# Altium PCB AX301_AX4010.PcbDoc (part 8 of 10)
Units mil, origin at the board's own origin, x right, y up, seen from the top; angles counter-clockwise.
Board outline 5185 x 3614 mil, 4 copper layers (Top Layer, GND, Mid-Layer 1, Bottom Layer); 191 components, 338 nets, 1108 pads, 420 vias.
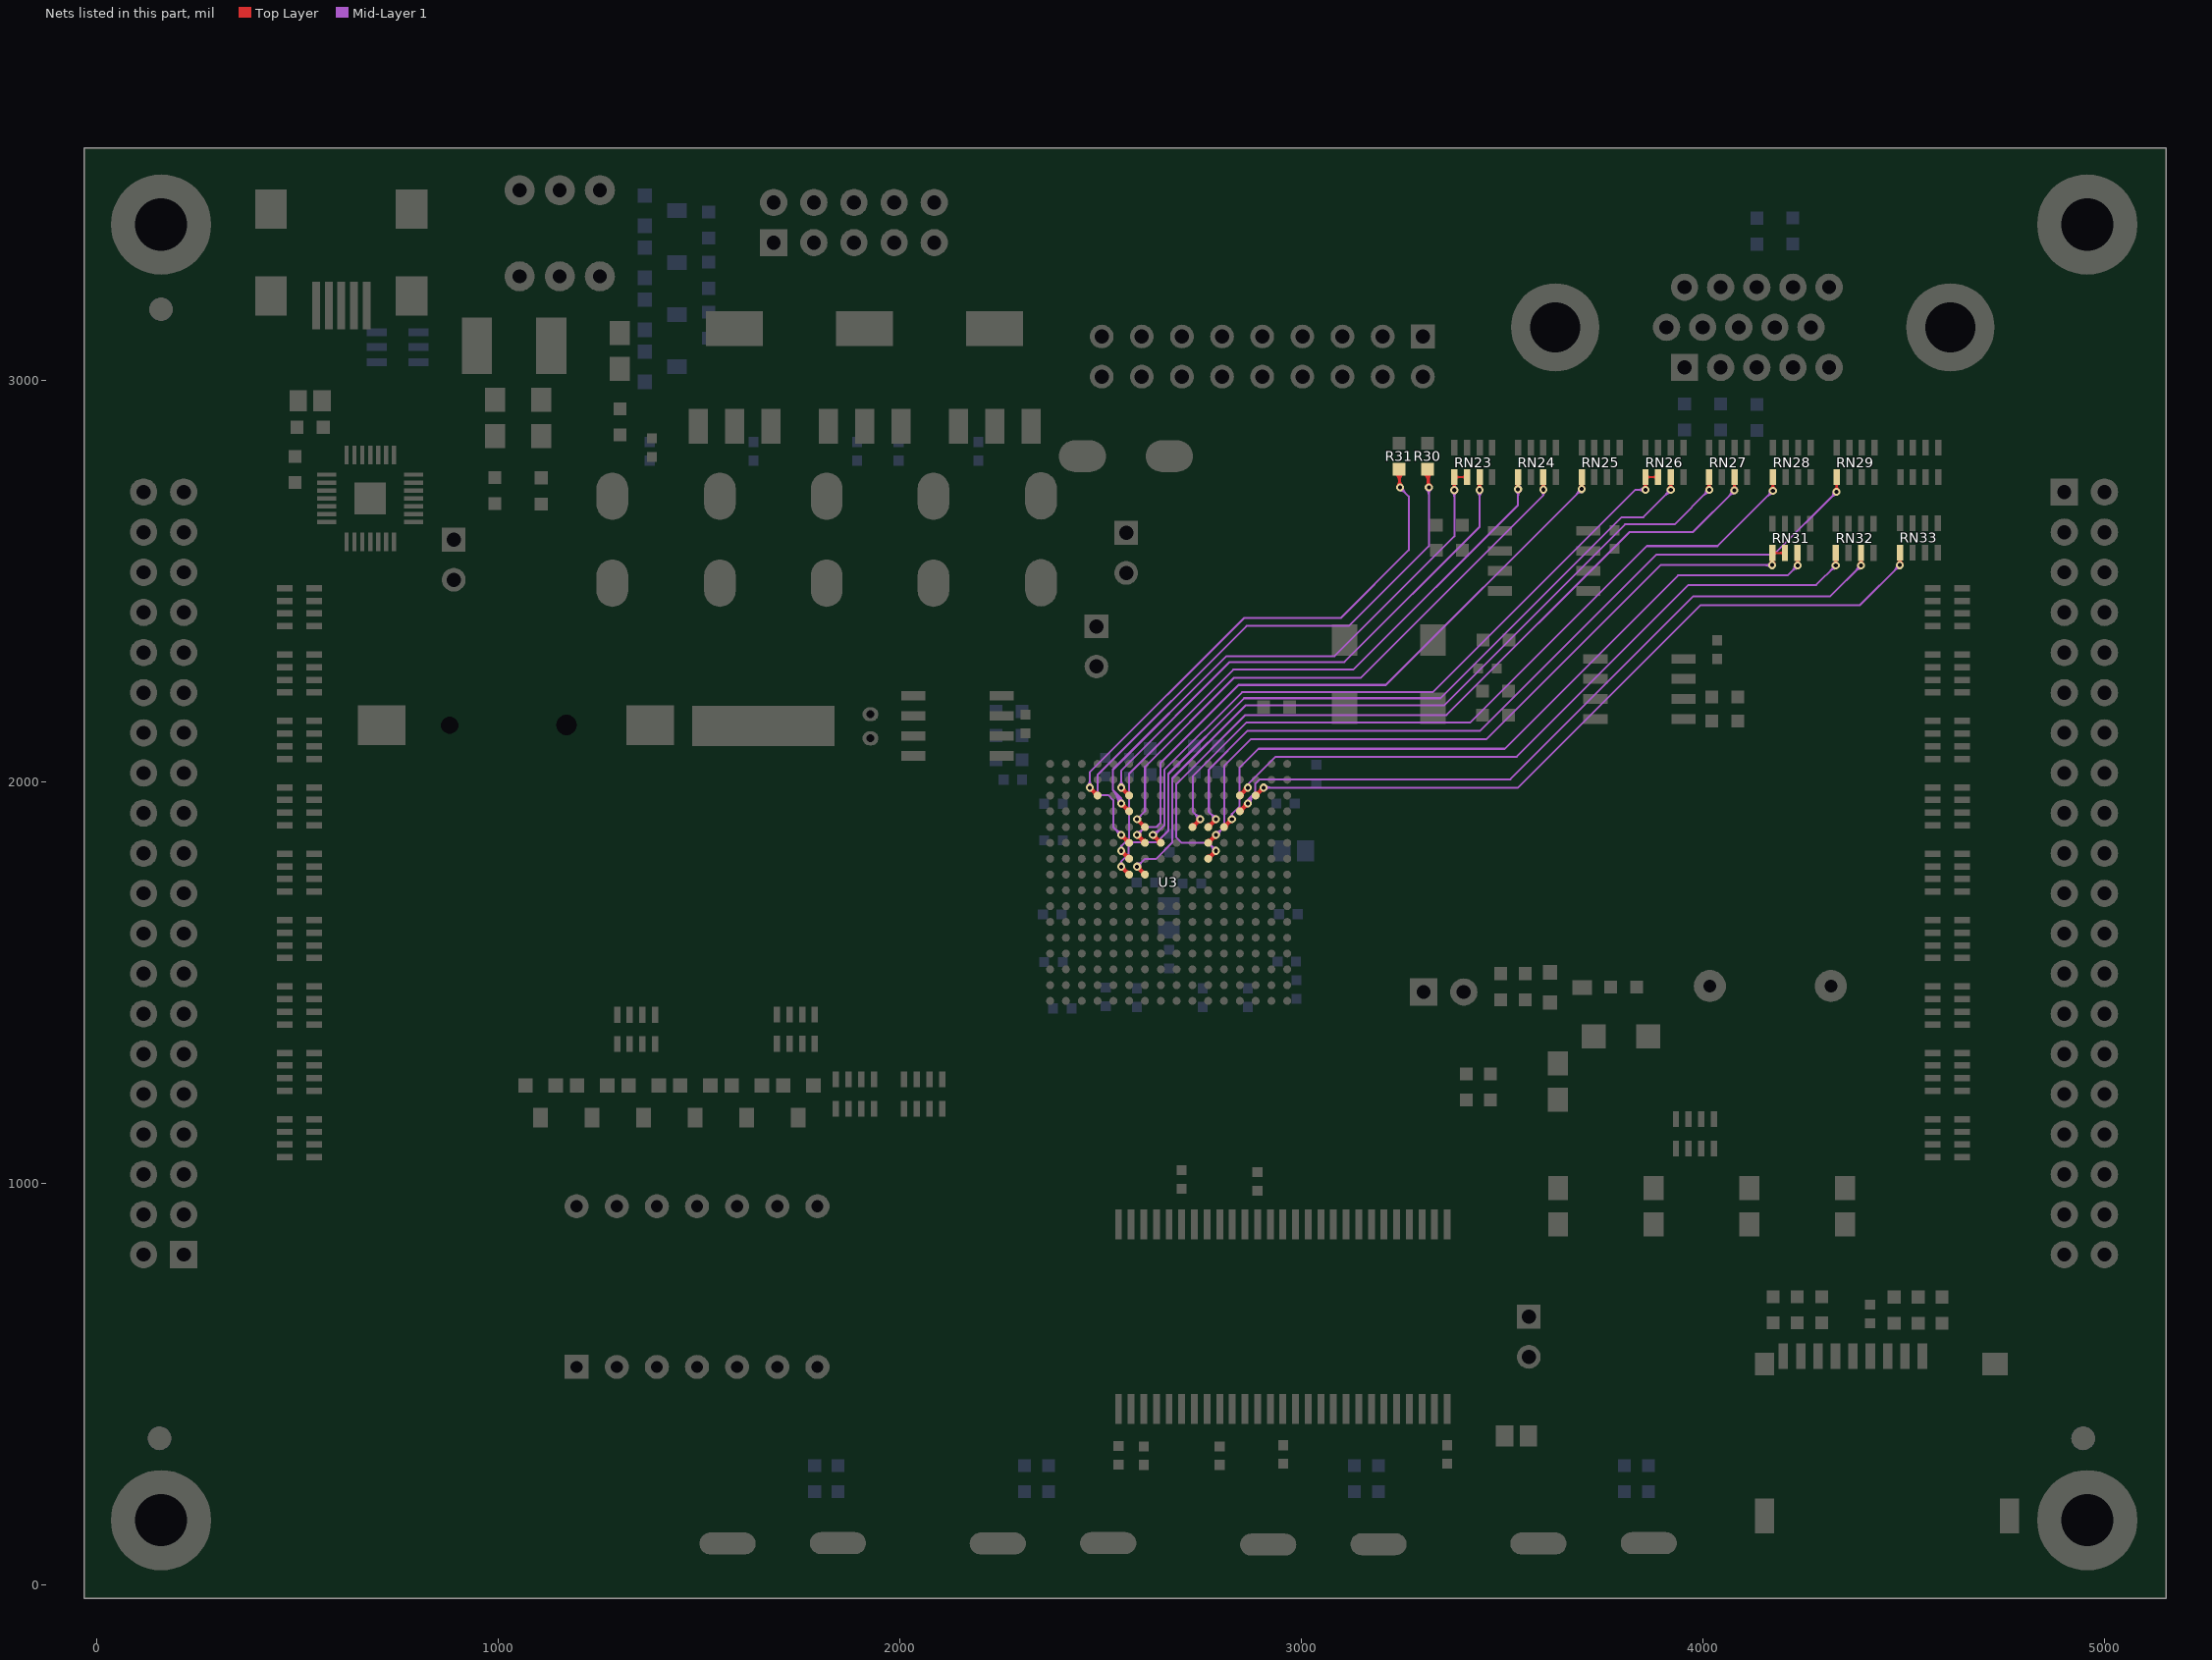
[diagram p10: the nets of this part, all layers, seen from the top]

## Via types
v1: diameter 20, hole 10, Top Layer to Bottom Layer, 377 vias
v2: diameter 30, hole 15, Top Layer to Bottom Layer, 41 vias
v3: diameter 40, hole 20, Top Layer to Bottom Layer, 2 vias

## Nets (pads, with @x,y where several pads share a name; then routed paths per layer and width w, separated by ;. In a path a pad name is that pad's centre, name@x,y a point inside that pad or via, vN(x,y) a via of type N, cw(c..) or ccw(c..) an arc to the next point about the centre after c; other vN are vias at no path point) (continued)
VGA_HSYNC: R30.2 U3.L6 | length 1688.8
  Top Layer w5: R30.2@3305.45,2768.45 cw(c3275.17,2738.17) v1@3318,2738.17 ; R30.2@3308.99,2771.99 cw(c3287.24,2750.24) 3318,2750.24 ; v1@3311.61,2736.93 ccw(c3292.71,2748.56) 3314.3,2753.7 ; v1@3312.7,2738.3 ccw(c3299.89,2751.11) 3318,2751.11 ccw(c3336.11,2751.11) v1@3323.3,2738.3 ; 3315.64,2748.08 ccw(c3329.28,2751.33) v1@3321.93,2739.39 ; v1(3318,2733) R30.2@3318,2775 ; 3318,2752.65 cw(c3340.35,2752.65) R30.2@3324.55,2768.45
  Top Layer w10: v1@2551.89,1862.11 cw(c2551.89,1850.04) 2560.42,1858.58 cw(c2568.96,1867.11) v1@2556.89,1867.11 ; v1(2551.89,1867.11) U3.L6@2571.57,1847.43 ; U3.L6@2566.73,1847.43 ccw(c2555.04,1847.43) 2563.31,1855.69 ccw(c2571.57,1863.96) U3.L6@2571.57,1852.27
  Mid-Layer 1 w5: v1@2544.39,1867.11 ccw(c2526.28,1867.11) 2539.09,1879.91 ccw(c2551.89,1892.72) v1@2551.89,1874.61 ; v1(2551.89,1867.11) 2532,1887 2532,1954 2519,1967 2500,1967 2493,1974 2493,2017 2864,2388 3119,2388 3318,2587 v1(3318,2733) ; v1@3312.7,2727.7 cw(c3299.89,2714.89) 3318,2714.89 cw(c3336.11,2714.89) v1@3323.3,2727.7
VGA_VSYNC: R31.2 U3.N3 | length 1521
  Top Layer w5: R31.2@3234.45,2768.45 cw(c3206.58,2740.58) v1@3246,2740.58 ; R31.2@3237.99,2771.99 cw(c3218.65,2752.65) 3246,2752.65 ; v1@3239.77,2737.18 ccw(c3221.64,2749.33) 3242.93,2754.15 ; v1@3240.7,2738.3 ccw(c3227.89,2751.11) 3246,2751.11 ccw(c3264.11,2751.11) v1@3251.3,2738.3 ; 3244.53,2747.09 ccw(c3256.61,2749.82) v1@3250,2739.34 ; v1(3246,2733) R31.2@3246,2776 ; 3246,2750.24 cw(c3271.76,2750.24) R31.2@3253.55,2768.45
  Top Layer w10: v1@2473.15,1980.22 cw(c2473.15,1968.15) 2481.68,1976.69 cw(c2490.22,1985.22) v1@2478.15,1985.22 ; v1(2473.15,1985.22) U3.N3@2492.83,1965.54 ; U3.N3@2487.99,1965.54 ccw(c2476.3,1965.54) 2484.57,1973.8 ccw(c2492.83,1982.07) U3.N3@2492.83,1970.38
  Mid-Layer 1 w5: v1@2467.85,1990.52 ccw(c2455.04,2003.33) 2473.15,2003.33 ccw(c2491.26,2003.33) v1@2478.45,1990.52 ; v1(2473.15,1985.22) 2473.15,2023.15 2858,2408 3099,2408 3268,2577 3268,2711 v1(3246,2733) ; v1@3246,2725.5 cw(c3246,2707.39) 3258.8,2720.2 cw(c3271.61,2733) v1@3253.5,2733
VGAD0: RN33.5 U3.C3 | length 2033.8
  Top Layer w5: v1@4486.21,2544.79 ccw(c4473.41,2557.59) 4491.51,2557.59 ccw(c4509.62,2557.59) v1@4496.82,2544.79 ; RN33.5@4487.71,2555.24 cw(c4478.54,2546.07) 4491.51,2546.07 cw(c4504.49,2546.07) RN33.5@4495.31,2555.24 ; v1@4488.89,2546.52 ccw(c4487.96,2549.01) 4490.54,2549.7 ccw(c4494.62,2550.8) v1@4493.5,2546.72 ; v1@4489.52,2546.72 ccw(c4488.4,2550.8) 4492.49,2549.7 ccw(c4495.06,2549.01) v1@4494.13,2546.52 ; v1(4491.51,2539.49) RN33.5@4491.51,2570.85
  Top Layer w10: U3.C3@2886.54,1965.54 v1(2906.22,1985.22) ; U3.C3@2886.54,1970.38 ccw(c2886.54,1982.07) 2894.8,1973.8 ccw(c2903.07,1965.54) U3.C3@2891.38,1965.54 ; v1@2901.22,1985.22 cw(c2889.15,1985.22) 2897.69,1976.69 cw(c2906.22,1968.15) v1@2906.22,1980.22
  Mid-Layer 1 w5: v1(2906.22,1985.22) 3540.22,1985.22 3995,2440 4392.02,2440 v1(4491.51,2539.49) ; v1@2911.52,1979.92 cw(c2924.33,1967.11) 2924.33,1985.22 cw(c2924.33,2003.33) v1@2911.52,1990.52 ; v1@4484.01,2539.49 cw(c4465.91,2539.49) 4478.71,2526.68 cw(c4491.51,2513.88) v1@4491.51,2531.99
VGAD1: RN32.7 U3.D4 | length 2046.5
  Top Layer w5: v1@4389.2,2543.8 ccw(c4376.4,2556.6) 4394.5,2556.6 ccw(c4412.61,2556.6) v1@4399.81,2543.8 ; RN32.7@4390.7,2554.24 cw(c4381.53,2545.07) 4394.5,2545.07 cw(c4407.48,2545.07) RN32.7@4398.3,2554.24 ; v1@4391.89,2545.52 ccw(c4390.96,2548.02) 4393.53,2548.71 ccw(c4397.61,2549.8) v1@4396.49,2545.73 ; v1@4392.52,2545.73 ccw(c4391.4,2549.8) 4395.48,2548.71 ccw(c4398.05,2548.02) v1@4397.12,2545.52 ; v1(4394.5,2538.5) RN32.7@4394.5,2569.85
  Top Layer w10: U3.D4@2847.17,1926.17 v1(2866.85,1945.85) ; U3.D4@2847.17,1931.01 ccw(c2847.17,1942.7) 2855.43,1934.43 ccw(c2863.7,1926.17) U3.D4@2852.01,1926.17 ; v1@2861.85,1945.85 cw(c2849.78,1945.85) 2858.32,1937.32 cw(c2866.85,1928.78) v1@2866.85,1940.85
  Mid-Layer 1 w5: v1@2864.35,1945.85 cw(c2880.02,1945.86) 2868.94,1956.94 ; v1(2866.85,1945.85) 2866.85,1954.85 2886,1974 ; v1@2869.35,1945.85 cw(c2897.07,1945.87) 2877.47,1965.47 ; v1@2874.35,1945.86 cw(c2914.12,1945.88) 2886,1974 ; v1@4387,2538.5 cw(c4368.9,2538.5) 4381.7,2525.69 cw(c4394.5,2512.89) v1@4394.5,2531 ; v1(4394.5,2538.5) 4318.01,2462 3977,2462 3521,2006 2897,2006 2886,1995 2886,1974
VGAD2: RN32.5 U3.D3 | length 1888.8
  Top Layer w5: v1@4326.21,2543.79 ccw(c4313.41,2556.59) 4331.51,2556.59 ccw(c4349.62,2556.59) v1@4336.82,2543.79 ; RN32.5@4327.71,2554.24 cw(c4318.54,2545.07) 4331.51,2545.07 cw(c4344.49,2545.07) RN32.5@4335.31,2554.24 ; v1@4328.89,2545.52 ccw(c4327.96,2548.01) 4330.54,2548.7 ccw(c4334.62,2549.8) v1@4333.5,2545.72 ; v1@4329.52,2545.72 ccw(c4328.4,2549.8) 4332.49,2548.7 ccw(c4335.06,2548.01) v1@4334.13,2545.52 ; v1(4331.51,2538.49) RN32.5@4331.51,2569.85
  Top Layer w10: U3.D3@2847.17,1965.54 v1(2866.85,1985.22) ; U3.D3@2847.17,1970.38 ccw(c2847.17,1982.07) 2855.43,1973.8 ccw(c2863.7,1965.54) U3.D3@2852.01,1965.54 ; v1@2861.85,1985.22 cw(c2849.78,1985.22) 2858.32,1976.69 cw(c2866.85,1968.15) v1@2866.85,1980.22
  Mid-Layer 1 w5: v1(2866.85,1985.22) 2866.85,1992.85 2936,2062 3537,2062 3965,2490 4283.02,2490 v1(4331.51,2538.49) ; v1@4324.01,2538.49 cw(c4305.91,2538.49) 4318.71,2525.68 cw(c4331.51,2512.88) v1@4331.51,2530.99
VGAD3: RN31.7 U3.E5 | length 1940.8
  Top Layer w5: v1@4231.2,2543.8 ccw(c4218.4,2556.6) 4236.5,2556.6 ccw(c4254.61,2556.6) v1@4241.81,2543.8 ; RN31.7@4232.7,2554.24 cw(c4223.53,2545.07) 4236.5,2545.07 cw(c4249.48,2545.07) RN31.7@4240.3,2554.24 ; v1@4233.89,2545.52 ccw(c4232.96,2548.02) 4235.53,2548.71 ccw(c4239.61,2549.8) v1@4238.49,2545.73 ; v1@4234.52,2545.73 ccw(c4233.4,2549.8) 4237.48,2548.71 ccw(c4240.05,2548.02) v1@4239.12,2545.52 ; v1(4236.5,2538.5) RN31.7@4236.5,2569.85
  Top Layer w10: U3.E5@2807.8,1886.8 v1(2827.48,1906.48) ; U3.E5@2807.8,1891.64 ccw(c2807.8,1903.33) 2816.06,1895.06 ccw(c2824.33,1886.8) U3.E5@2812.64,1886.8 ; v1@2822.48,1906.48 cw(c2810.41,1906.48) 2818.95,1897.95 cw(c2827.48,1889.41) v1@2827.48,1901.48
  Mid-Layer 1 w5: v1@2823.73,1912.97 ccw(c2819.97,1919.48) 2827.48,1919.48 ; v1(2827.48,1906.48) 2827.48,1919.48 ; v1@2831.24,1912.97 cw(c2835,1919.48) 2827.48,1919.48 ; v1@4229,2538.5 cw(c4210.9,2538.5) 4223.7,2525.69 cw(c4236.5,2512.89) v1@4236.5,2531 ; v1(4236.5,2538.5) 4212.01,2514 3939,2514 3507,2082 2894,2082 2846,2034 2846,1938 2827.48,1919.48
VGAD4: RN31.5 RN31.6 U3.F6 | length 2026.4
  Top Layer w5: v1@4168.21,2544.79 ccw(c4155.41,2557.59) 4173.51,2557.59 ccw(c4191.62,2557.59) v1@4178.82,2544.79 ; RN31.5@4169.71,2554.24 cw(c4160.54,2545.07) 4173.51,2545.07 cw(c4186.49,2545.07) RN31.5@4177.31,2554.24 ; v1(4173.51,2539.49) RN31.5@4173.51,2569.85 RN31.6@4205.01,2569.85 ; RN31.5@4177.31,2566.05 cw(c4186.49,2556.88) 4186.49,2569.85 cw(c4186.49,2582.82) RN31.5@4177.31,2573.65 ; RN31.6@4201.21,2566.05 ccw(c4192.03,2556.88) 4192.03,2569.85 ccw(c4192.03,2582.82) RN31.6@4201.21,2573.65
  Top Layer w10: U3.F6@2768.43,1847.43 v1(2788.11,1867.11) ; U3.F6@2768.43,1852.27 ccw(c2768.43,1863.96) 2776.69,1855.69 ccw(c2784.96,1847.43) U3.F6@2773.27,1847.43 ; v1@2783.11,1867.11 cw(c2771.04,1867.11) 2779.58,1858.58 cw(c2788.11,1850.04) v1@2788.11,1862.11
  Mid-Layer 1 w5: v1(2788.11,1867.11) 2808,1887 2808,2039 2875,2106 3462,2106 3895.49,2539.49 v1(4173.51,2539.49) ; v1@2788.11,1874.61 ccw(c2788.11,1892.72) 2800.91,1879.91 ccw(c2813.72,1867.11) v1@2795.61,1867.11 ; v1@4168.21,2534.18 ccw(c4155.41,2521.38) 4155.41,2539.49 ccw(c4155.41,2557.59) v1@4168.21,2544.79
VGAD5: RN29.5 U3.F5 | length 2189.1
  Top Layer w5: v1@4328.49,2727.51 ccw(c4315.69,2740.31) 4333.8,2740.31 ccw(c4351.9,2740.31) v1@4339.1,2727.51 ; RN29.5@4330,2743.24 cw(c4320.82,2734.07) 4333.8,2734.07 cw(c4346.77,2734.07) RN29.5@4337.6,2743.24 ; v1(4333.8,2722.2) RN29.5@4333.8,2758.85
  Top Layer w10: U3.F5@2768.43,1886.8 v1(2788.11,1906.48) ; U3.F5@2768.43,1891.64 ccw(c2768.43,1903.33) 2776.69,1895.06 ccw(c2784.96,1886.8) U3.F5@2773.27,1886.8 ; v1@2783.11,1906.48 cw(c2771.04,1906.48) 2779.58,1897.95 cw(c2788.11,1889.41) v1@2788.11,1901.48
  Mid-Layer 1 w5: v1@2780.61,1906.48 ccw(c2762.5,1906.48) 2775.31,1919.28 ccw(c2788.11,1932.09) v1@2788.11,1913.98 ; v1(2788.11,1906.48) 2770,1924.59 2770,2030 2867,2127 3446,2127 3885,2566 4177.59,2566 v1(4333.8,2722.2) ; v1@4326.3,2722.2 cw(c4308.19,2722.2) 4320.99,2709.4 cw(c4333.8,2696.6) v1@4333.8,2714.7
VGAD6: RN28.5 U3.G5 | length 2084.5
  Top Layer w5: v1@4169.78,2730.22 ccw(c4156.98,2743.02) 4175.08,2743.02 ccw(c4193.19,2743.02) v1@4180.39,2730.22 ; RN28.5@4171.28,2743.24 cw(c4162.11,2734.07) 4175.08,2734.07 cw(c4188.06,2734.07) RN28.5@4178.88,2743.24 ; v1@4171.71,2731.62 ccw(c4168.19,2738.62) 4175.76,2736.59 ccw(c4179.7,2735.54) v1@4178.07,2731.8 ; v1@4172.09,2731.8 ccw(c4170.47,2735.54) 4174.41,2736.59 ccw(c4181.98,2738.62) v1@4178.45,2731.62 ; v1(4175.08,2724.92) RN28.5@4175.08,2758.85
  Top Layer w10: U3.G5@2729.06,1886.8 v1(2748.74,1906.48) ; U3.G5@2729.06,1891.64 ccw(c2729.06,1903.33) 2737.32,1895.06 ccw(c2745.59,1886.8) U3.G5@2733.9,1886.8 ; v1@2743.74,1906.48 cw(c2731.67,1906.48) 2740.21,1897.95 cw(c2748.74,1889.41) v1@2748.74,1901.48
  Mid-Layer 1 w5: v1@2741.24,1906.48 ccw(c2723.13,1906.48) 2735.94,1919.28 ccw(c2748.74,1932.09) v1@2748.74,1913.98 ; v1(2748.74,1906.48) 2730,1925.22 2730,2014 2863,2147 3421,2147 3861,2587 4037.17,2587 v1(4175.08,2724.92) ; v1@4167.58,2724.92 cw(c4149.48,2724.92) 4162.28,2712.11 cw(c4175.08,2699.31) v1@4175.08,2717.42
VGAD7: RN27.7 U3.F7 | length 2165.9
  Top Layer w5: v1@4074.06,2730.94 ccw(c4061.25,2743.75) 4079.36,2743.75 ccw(c4097.47,2743.75) v1@4084.66,2730.94 ; RN27.7@4075.56,2743.24 cw(c4066.39,2734.07) 4079.36,2734.07 cw(c4092.33,2734.07) RN27.7@4083.16,2743.24 ; v1@4076.35,2732.51 ccw(c4073.66,2738.64) 4080.12,2736.9 ccw(c4083.67,2735.95) v1@4082.25,2732.56 ; v1@4076.47,2732.56 ccw(c4075.05,2735.95) 4078.6,2736.9 ccw(c4085.07,2738.64) v1@4082.38,2732.51 ; v1(4079.36,2725.64) RN27.7@4079.36,2758.85
  Top Layer w10: U3.F7@2768.43,1808.06 v1(2788.11,1827.74) ; U3.F7@2768.43,1812.9 ccw(c2768.43,1824.59) 2776.69,1816.32 ccw(c2784.96,1808.06) U3.F7@2773.27,1808.06 ; v1@2783.11,1827.74 cw(c2771.04,1827.74) 2779.58,1819.21 cw(c2788.11,1810.67) v1@2788.11,1822.74
  Mid-Layer 1 w5: v1@2780.61,1827.74 ccw(c2762.5,1827.74) 2775.31,1840.54 ccw(c2788.11,1853.35) v1@2788.11,1835.24 ; v1(2788.11,1827.74) 2767.85,1848 2702,1848 2689,1861 2689,1994 2861,2166 3362,2166 3818,2622 3975.72,2622 v1(4079.36,2725.64) ; v1@4071.86,2725.64 cw(c4053.75,2725.64) 4066.56,2712.84 cw(c4079.36,2700.03) v1@4079.36,2718.14
VGAD8: RN27.5 U3.K8 | length 2127.2
  Top Layer w5: v1@4011.07,2732.67 ccw(c3998.26,2745.48) 4016.37,2745.48 ccw(c4034.48,2745.48) v1@4021.67,2732.67 ; RN27.5@4012.57,2743.24 cw(c4003.39,2734.07) 4016.37,2734.07 cw(c4029.34,2734.07) RN27.5@4020.17,2743.24 ; v1@4013.73,2734.39 ccw(c4012.77,2736.95) 4015.41,2737.65 ccw(c4019.63,2738.78) v1@4018.43,2734.58 ; v1@4014.31,2734.58 ccw(c4013.11,2738.78) 4017.33,2737.65 ccw(c4019.97,2736.95) v1@4019.01,2734.39 ; v1(4016.37,2727.37) RN27.5@4016.37,2758.85
  Top Layer w10: v1@2591.26,1783.37 cw(c2591.26,1771.3) 2599.79,1779.84 cw(c2608.33,1788.37) v1@2596.26,1788.37 ; v1(2591.26,1788.37) U3.K8@2610.94,1768.68 ; U3.K8@2606.1,1768.68 ccw(c2594.41,1768.68) 2602.68,1776.95 ccw(c2610.94,1785.22) U3.K8@2610.94,1773.53
  Mid-Layer 1 w5: v1(2591.26,1788.37) 2610.89,1808 2639,1808 2679,1848 2679,2008 2861,2190 3356,2190 3807,2641 3930,2641 v1(4016.37,2727.37) ; v1@2591.26,1795.87 ccw(c2591.26,1813.98) 2604.06,1801.17 ccw(c2616.87,1788.37) v1@2598.76,1788.37 ; v1@4008.87,2727.37 cw(c3990.76,2727.37) 4003.57,2714.57 cw(c4016.37,2701.76) v1@4016.37,2719.87
VGAD9: RN26.7 U3.L8 | length 2066.1
  Top Layer w5: v1@3915.34,2732.66 ccw(c3902.54,2745.46) 3920.65,2745.46 ccw(c3938.75,2745.46) v1@3925.95,2732.66 ; RN26.7@3916.85,2743.24 cw(c3907.67,2734.07) 3920.65,2734.07 cw(c3933.62,2734.07) RN26.7@3924.45,2743.24 ; v1@3918.01,2734.37 ccw(c3917.04,2736.94) 3919.69,2737.65 ccw(c3923.93,2738.78) v1@3922.72,2734.56 ; v1@3918.58,2734.56 ccw(c3917.37,2738.78) 3921.61,2737.65 ccw(c3924.25,2736.94) v1@3923.29,2734.37 ; v1(3920.65,2727.35) RN26.7@3920.65,2758.85
  Top Layer w10: v1@2551.89,1783.37 cw(c2551.89,1771.3) 2560.42,1779.84 cw(c2568.96,1788.37) v1@2556.89,1788.37 ; v1(2551.89,1788.37) U3.L8@2571.57,1768.68 ; U3.L8@2566.73,1768.68 ccw(c2555.04,1768.68) 2563.31,1776.95 ccw(c2571.57,1785.22) U3.L8@2571.57,1773.53
  Mid-Layer 1 w5: v1@2548.05,1794.81 ccw(c2544.01,1801.58) 2551.89,1801.58 ; v1(2551.89,1788.37) 2551.89,1801.58 ; v1@2555.73,1794.81 cw(c2559.77,1801.58) 2551.89,1801.58 ; v1@3913.15,2727.35 cw(c3895.04,2727.35) 3907.84,2714.55 cw(c3920.65,2701.75) v1@3920.65,2719.85 ; v1(3920.65,2727.35) 3852.29,2659 3798,2659 3347,2208 2858,2208 2669,2019 2669,1878 2640,1849 2581,1849 2570,1838 2570,1819.69 2551.89,1801.58
VGAD10: RN26.5 RN26.6 U3.J6 | length 1969.2
  Top Layer w5: v1@3852.35,2732.65 ccw(c3839.55,2745.45) 3857.65,2745.45 ccw(c3875.76,2745.45) v1@3862.96,2732.65 ; RN26.5@3853.85,2743.24 cw(c3844.68,2734.07) 3857.65,2734.07 cw(c3870.63,2734.07) RN26.5@3861.45,2743.24 ; v1@3855.01,2734.36 ccw(c3854.05,2736.93) 3856.7,2737.64 ccw(c3860.94,2738.78) v1@3859.73,2734.55 ; v1@3855.58,2734.55 ccw(c3854.36,2738.78) 3858.61,2737.64 ccw(c3861.26,2736.93) v1@3860.3,2734.36 ; v1(3857.65,2727.35) RN26.5@3857.65,2758.85 ; RN26.5@3861.45,2755.05 cw(c3870.63,2745.88) 3870.63,2758.85 cw(c3870.63,2771.82) RN26.5@3861.45,2762.65 ; RN26.5@3862.51,2758.85 RN26.6@3889.15,2758.85 RN26.6@3894.01,2758.85 ; RN26.6@3885.35,2755.05 ccw(c3876.18,2745.88) 3876.18,2758.85 ccw(c3876.18,2771.82) RN26.6@3885.35,2762.65
  Top Layer w10: v1@2630.63,1862.11 cw(c2630.63,1850.04) 2639.16,1858.58 cw(c2647.7,1867.11) v1@2635.63,1867.11 ; v1(2630.63,1867.11) U3.J6@2650.32,1847.43 ; U3.J6@2645.47,1847.43 ccw(c2633.78,1847.43) 2642.05,1855.69 ccw(c2650.32,1863.96) U3.J6@2650.32,1852.27
  Mid-Layer 1 w5: v1(2630.63,1867.11) 2635.11,1867.11 2659,1891 2659,2029 2853,2223 3328,2223 3832.35,2727.35 v1(3857.65,2727.35) ; v1@2630.63,1869.61 ccw(c2630.63,1886.47) 2642.55,1874.55 ; v1@2630.63,1874.61 ccw(c2630.63,1903.54) 2651.08,1883.08 ; v1@2638.13,1867.11 cw(c2645.41,1867.11) 2640.26,1872.26 ; v1@3852.35,2722.04 ccw(c3839.55,2709.24) 3839.55,2727.35 ccw(c3839.55,2745.45) v1@3852.35,2732.65
VGAD11: RN25.5 U3.K6 | length 1752.7
  Top Layer w5: v1@3693.64,2734.36 ccw(c3680.83,2747.17) 3698.94,2747.17 ccw(c3717.05,2747.17) v1@3704.24,2734.36 ; RN25.5@3695.14,2743.24 cw(c3685.97,2734.07) 3698.94,2734.07 cw(c3711.91,2734.07) RN25.5@3702.74,2743.24 ; v1(3698.94,2729.06) RN25.5@3698.94,2758.85
  Top Layer w10: v1@2591.26,1862.11 cw(c2591.26,1850.04) 2599.79,1858.58 cw(c2608.33,1867.11) v1@2596.26,1867.11 ; v1(2591.26,1867.11) U3.K6@2610.94,1847.43 ; U3.K6@2606.1,1847.43 ccw(c2594.41,1847.43) 2602.68,1855.69 ccw(c2610.94,1863.96) U3.K6@2610.94,1852.27
  Mid-Layer 1 w5: v1(2591.26,1867.11) 2611.15,1887 2639,1887 2649,1897 2649,2046 2844,2241 3210.88,2241 v1(3698.94,2729.06) ; v1@2591.26,1874.61 ccw(c2591.26,1892.72) 2604.06,1879.91 ccw(c2616.87,1867.11) v1@2598.76,1867.11 ; v1@3691.44,2729.06 cw(c3673.33,2729.06) 3686.14,2716.26 cw(c3698.94,2703.45) v1@3698.94,2721.56
VGAD12: RN24.7 U3.K5 | length 1553.1
  Top Layer w5: v1@3597.91,2733.09 ccw(c3585.11,2745.89) 3603.22,2745.89 ccw(c3621.32,2745.89) v1@3608.52,2733.09 ; RN24.7@3599.42,2743.24 cw(c3590.24,2734.07) 3603.22,2734.07 cw(c3616.19,2734.07) RN24.7@3607.02,2743.24 ; v1(3603.22,2727.78) RN24.7@3603.22,2758.85
  Top Layer w10: v1(2591.26,1906.48) U3.K5@2610.94,1886.8
  Mid-Layer 1 w5: v1(2591.26,1906.48) 2611,1926.22 2611,2037 2833,2259 3149,2259 3603.22,2713.22 ; v1@3598.86,2721.68 cw(c3592.83,2713.22) 3603.22,2713.22 ; v1(3603.22,2727.78) 3603.22,2713.22 ; v1@3607.57,2721.68 ccw(c3613.61,2713.22) 3603.22,2713.22
VGAD13: RN24.5 U3.L7 | length 1671.5
  Top Layer w5: v1@3534.92,2734.08 ccw(c3522.12,2746.88) 3540.23,2746.88 ccw(c3558.33,2746.88) v1@3545.53,2734.08 ; RN24.5@3536.43,2743.24 cw(c3527.25,2734.07) 3540.23,2734.07 cw(c3553.2,2734.07) RN24.5@3544.03,2743.24 ; v1(3540.23,2728.77) RN24.5@3540.23,2758.85
  Top Layer w10: v1@2551.89,1822.74 cw(c2551.89,1810.67) 2560.42,1819.21 cw(c2568.96,1827.74) v1@2556.89,1827.74 ; v1(2551.89,1827.74) U3.L7@2571.57,1808.06 ; U3.L7@2566.73,1808.06 ccw(c2555.04,1808.06) 2563.31,1816.32 ccw(c2571.57,1824.59) U3.L7@2571.57,1812.9
  Mid-Layer 1 w5: v1@2548.53,1834.45 ccw(c2545.8,1839.89) 2551.89,1839.89 ; v1(2551.89,1827.74) 2551.89,1839.89 ; v1@2555.25,1834.45 cw(c2557.98,1839.89) 2551.89,1839.89 ; v1@3534.92,2723.47 cw(c3522.12,2710.67) 3540.23,2710.67 cw(c3558.33,2710.67) v1@3545.53,2723.47 ; v1(3540.23,2728.77) 3540.23,2689.23 3130,2279 2831,2279 2571,2019 2571,1859 2551.89,1839.89
VGAD14: RN23.7 U3.L3 | length 1501.6
  Top Layer w5: v1@3439.2,2731.8 ccw(c3426.4,2744.6) 3444.5,2744.6 ccw(c3462.61,2744.6) v1@3449.81,2731.8 ; RN23.7@3440.7,2743.24 cw(c3431.53,2734.07) 3444.5,2734.07 cw(c3457.48,2734.07) RN23.7@3448.3,2743.24 ; v1@3441.73,2733.46 ccw(c3440.55,2736.44) 3443.64,2737.27 ; v1@3441.94,2733.55 ccw(c3440.08,2738.69) 3445.36,2737.27 ; 3443.64,2737.27 ccw(c3448.93,2738.69) v1@3447.06,2733.55 ; v1(3444.5,2726.5) RN23.7@3444.5,2758.85 ; 3445.36,2737.27 ccw(c3448.46,2736.44) v1@3447.28,2733.46
  Top Layer w10: v1@2551.89,1980.22 cw(c2551.89,1968.15) 2560.42,1976.69 cw(c2568.96,1985.22) v1@2556.89,1985.22 ; v1(2551.89,1985.22) U3.L3@2571.57,1965.54 ; U3.L3@2566.73,1965.54 ccw(c2555.04,1965.54) 2563.31,1973.8 ccw(c2571.57,1982.07) U3.L3@2571.57,1970.38
  Mid-Layer 1 w5: v1@2546.59,1990.52 ccw(c2533.78,2003.33) 2551.89,2003.33 ccw(c2570,2003.33) v1@2557.19,1990.52 ; v1(2551.89,1985.22) 2551.89,2027.89 2822,2298 3108,2298 3444.5,2634.5 v1(3444.5,2726.5) ; v1@3439.2,2721.19 cw(c3426.4,2708.39) 3444.5,2708.39 cw(c3462.61,2708.39) v1@3449.81,2721.19
VGAD15: RN23.5 RN23.6 U3.L4 | length 1662.2
  Top Layer w5: v1@3376.21,2731.79 ccw(c3363.41,2744.59) 3381.51,2744.59 ccw(c3399.62,2744.59) v1@3386.82,2731.79 ; RN23.5@3377.71,2743.24 cw(c3368.54,2734.07) 3381.51,2734.07 cw(c3394.49,2734.07) RN23.5@3385.31,2743.24 ; v1@3378.74,2733.46 ccw(c3377.55,2736.44) 3380.65,2737.27 ccw(c3385.95,2738.69) v1@3384.08,2733.54 ; v1@3378.95,2733.54 ccw(c3377.07,2738.69) 3382.37,2737.27 ccw(c3385.47,2736.44) v1@3384.28,2733.46 ; v1(3381.51,2726.49) RN23.5@3381.51,2758.85 RN23.6@3413.01,2758.85 ; RN23.5@3385.31,2755.05 cw(c3394.49,2745.88) 3394.49,2758.85 cw(c3394.49,2771.82) RN23.5@3385.31,2762.65 ; RN23.6@3409.21,2755.05 ccw(c3400.03,2745.88) 3400.03,2758.85 ccw(c3400.03,2771.82) RN23.6@3409.21,2762.65
  Top Layer w10: v1@2551.89,1940.85 cw(c2551.89,1928.78) 2560.42,1937.32 cw(c2568.96,1945.85) v1@2556.89,1945.85 ; v1(2551.89,1945.85) U3.L4@2571.57,1926.17 ; U3.L4@2566.73,1926.17 ccw(c2555.04,1926.17) 2563.31,1934.43 ccw(c2571.57,1942.7) U3.L4@2571.57,1931.01
  Mid-Layer 1 w5: 2539.36,1970.64 cw(c2515.12,1946.41) v1@2549.39,1945.89 ; v1@2544.39,1945.97 ccw(c2498.67,1946.66) 2531,1979 ; 2547.71,1962.29 cw(c2531.58,1946.16) v1@2554.39,1945.81 ; v1@2548.47,1952.53 ccw(c2545.62,1958.11) 2551.89,1958.11 ; v1(2551.89,1945.85) 2551.89,1958.11 ; v1@2555.3,1952.53 cw(c2558.16,1958.11) 2551.89,1958.11 ; v1@3376.21,2721.18 cw(c3363.41,2708.38) 3381.51,2708.38 cw(c3399.62,2708.38) v1@3386.82,2721.18 ; v1(3381.51,2726.49) 3381.51,2611.51 3083,2313 2814,2313 2531,2030 2531,1979 ; 2531,1979 2551.89,1958.11
pads on no net: Designator13_2.1 Designator13_2_1.1 Designator13_2_2.1 Designator17_2.1 Designator17_2_1.1 Designator17_2_2.1 J3.7 J3.8 J4.4 J4.9 J4.11 J4.12 J4.15 J4.16 J4.17 J6.4 J6.6 J6.7 J6.8 J6.9 RN9.3 RN9.4 RN9.5 RN9.6 RN11.1 RN11.2 RN11.7 RN11.8 RN19.3 RN19.4 RN19.5 RN19.6 RN23.1 RN23.8 RN24.3 RN24.6 RN26.1 RN26.8 RN27.3 RN27.6 RN31.1 RN31.8 RN32.3 RN32.6 SW1.1 SW1.4 U2.4 U2.6 U4.0 U4.1 U4.2 U4.10 U4.11 U4.12 U4.13 U4.14 U4.15 U4.16 U4.17 U4.18 U4.19 U4.20 U4.21 U4.22 U4.23 U4.24 U4.27 U4.28 U9.40 U10.0 U14.10
copper on no net: | length 232359